# Altium PCB PCB1.PcbDoc
Units mm, origin at the board's own origin, x right, y up, seen from the top; angles counter-clockwise.
Board outline 60 x 32 mm, 2 copper layers (Top Layer, Bottom Layer); 27 components, 11 nets, 72 pads, 72 vias.
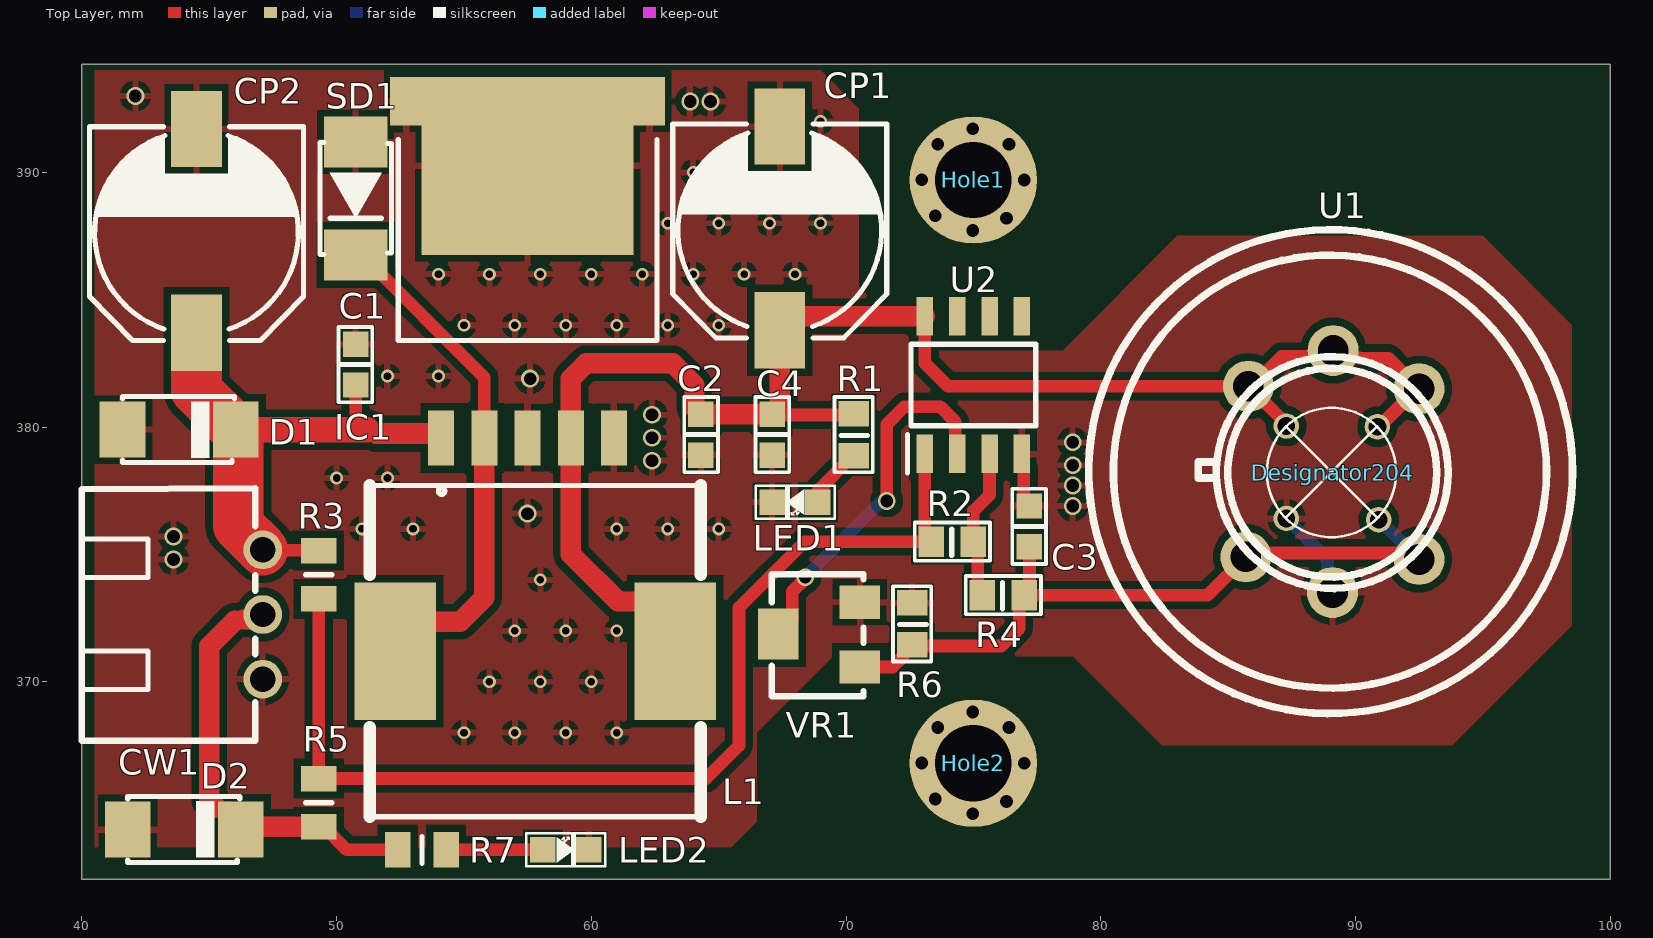
[diagram p0: Top Layer view]
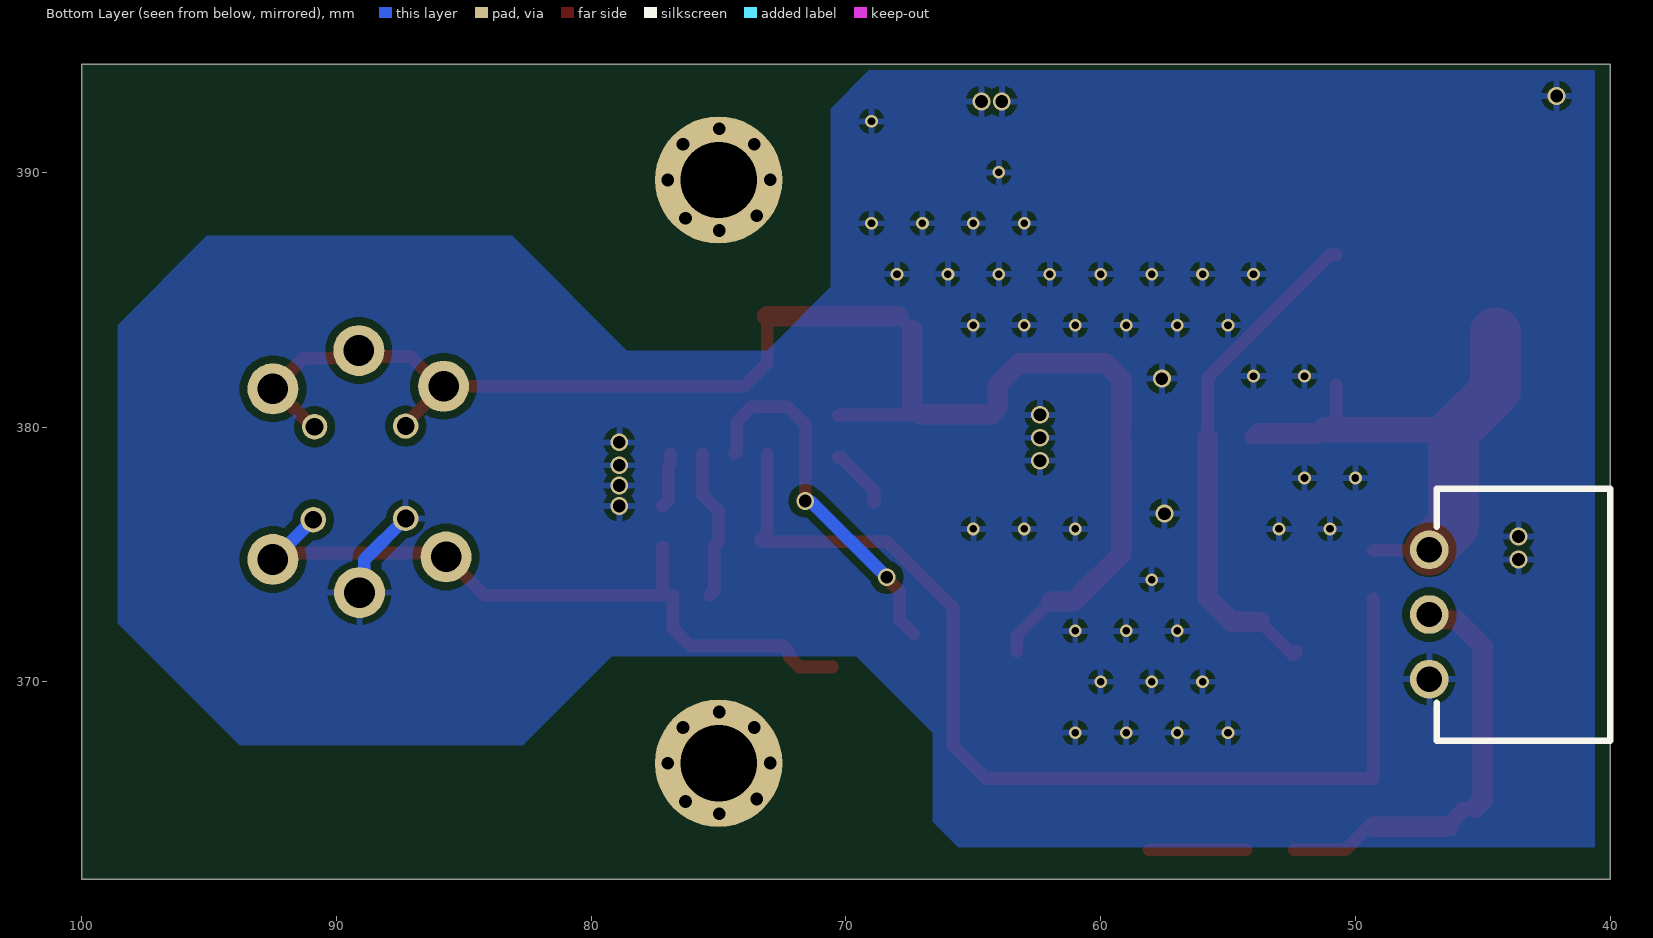
[diagram p1: Bottom Layer view, seen from below]
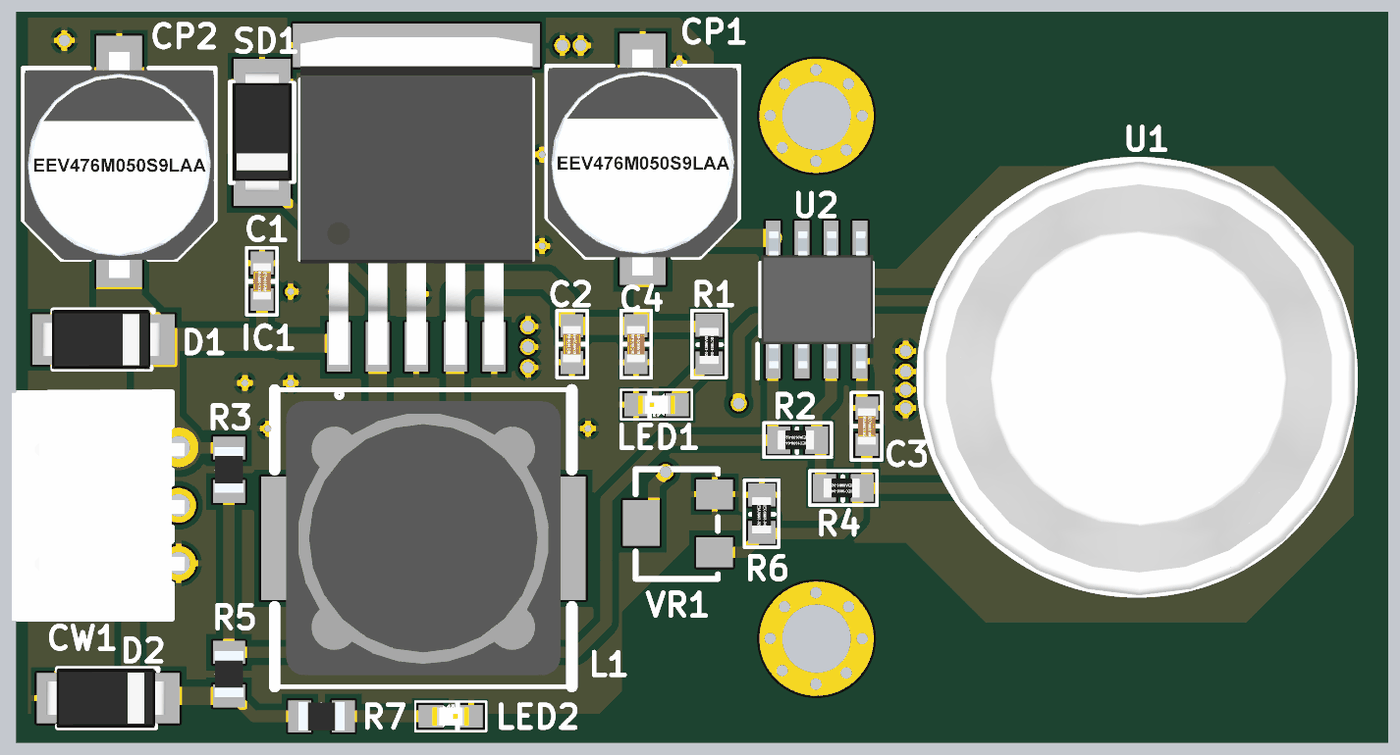
[diagram p2: 3D render of the assembled board from above, using the file's embedded part models]

## Layer stack, top to bottom
Top Solder: solder mask 0.0102, Solder Resist, Dk 3.5
Top Layer: signal copper 0.0356
Dielectric 1: dielectric 0.32, FR-4, Dk 4.8
Bottom Layer: signal copper 0.0356
Bottom Solder: solder mask 0.0102, Solder Resist, Dk 3.5

## Board outline
40,362.25 100,362.25 100,394.25 40,394.25

## Design rules (kind name [scope] priority, off if disabled: settings)
Clearance "Schematic Clearance Constraint_10" [InNet('GND')] p1: gap=0.3 ignorepadtopadclearanceinfootprint=FALSE
Clearance "Schematic Clearance Constraint_9" [InNet('NetU2_2')] p2: gap=0.3 ignorepadtopadclearanceinfootprint=FALSE
Clearance "Schematic Clearance Constraint_8" [InNet('NetR2_2')] p3: gap=0.3 ignorepadtopadclearanceinfootprint=FALSE
Clearance "Schematic Clearance Constraint_7" [InNet('NetLED1_1')] p4: gap=0.3 ignorepadtopadclearanceinfootprint=FALSE
Clearance "Schematic Clearance Constraint_6" [InNet('SIGNAL_OUT')] p5: gap=0.3 ignorepadtopadclearanceinfootprint=FALSE
Clearance "Schematic Clearance Constraint_5" [InNet('NetIC1_2')] p6: gap=0.3 ignorepadtopadclearanceinfootprint=FALSE
Clearance "Schematic Clearance Constraint_4" [InNet('GND')] p7: gap=0.2 ignorepadtopadclearanceinfootprint=FALSE
Clearance "Schematic Clearance Constraint_3" [InNet('+24')] p8: gap=0.3 ignorepadtopadclearanceinfootprint=FALSE
Clearance "Schematic Clearance Constraint_2" [InNet('V_SENS')] p9: gap=0.3 ignorepadtopadclearanceinfootprint=FALSE
Clearance "Schematic Clearance Constraint_1" [InNet('NetR2_1')] p10: gap=0.3 ignorepadtopadclearanceinfootprint=FALSE
Clearance "Schematic Clearance Constraint" [InNet('+5')] p11: gap=0.3 ignorepadtopadclearanceinfootprint=FALSE
Clearance [All] p12: gap=0.254 ignorepadtopadclearanceinfootprint=FALSE except(0: Arc-Hole Track-Hole SMDPad-Hole THPad-Hole Via-Hole Fill-Hole Poly-Hole Region-Hole Text-Hole)
ComponentClearance [All] p1: gap=0 collisioncheckmode=3 verticalgap=0 showdistances=FALSE
PolygonConnect [All] p1: connectstyle=Relief reliefconductorwidth=0.254 reliefentries=4 polygonreliefangle="90 Angle" airgapwidth=0.254
RoutingVias "Schematic Routing Via Style_10" [InNet('NetLED2_1')] p1: holewidth=0.5 width=0.8 viastyle="Through Hole" minholewidth=0.3 minwidth=0.5 maxholewidth=0.8 maxwidth=1.2
RoutingVias "Schematic Routing Via Style_9" [InNet('NetLED1_1')] p2: holewidth=0.5 width=0.8 viastyle="Through Hole" minholewidth=0.3 minwidth=0.5 maxholewidth=0.8 maxwidth=1.2
RoutingVias "Schematic Routing Via Style_8" [InNet('NetU2_2')] p3: holewidth=0.5 width=0.8 viastyle="Through Hole" minholewidth=0.3 minwidth=0.5 maxholewidth=0.8 maxwidth=1.2
RoutingVias "Schematic Routing Via Style_7" [InNet('NetIC1_2')] p4: holewidth=0.5 width=0.8 viastyle="Through Hole" minholewidth=0.3 minwidth=0.5 maxholewidth=0.8 maxwidth=1.2
RoutingVias "Schematic Routing Via Style_6" [InNet('+24')] p5: holewidth=0.5 width=0.8 viastyle="Through Hole" minholewidth=0.3 minwidth=0.5 maxholewidth=0.8 maxwidth=1.2
RoutingVias "Schematic Routing Via Style_5" [InNet('SIGNAL_OUT')] p6: holewidth=0.5 width=0.8 viastyle="Through Hole" minholewidth=0.3 minwidth=0.5 maxholewidth=0.8 maxwidth=1.2
RoutingVias "Schematic Routing Via Style_4" [InNet('V_SENS')] p7: holewidth=0.5 width=0.8 viastyle="Through Hole" minholewidth=0.3 minwidth=0.5 maxholewidth=0.8 maxwidth=1.2
RoutingVias "Schematic Routing Via Style_3" [InNet('GND')] p8: holewidth=0.5 width=0.8 viastyle="Through Hole" minholewidth=0.3 minwidth=0.5 maxholewidth=0.8 maxwidth=1.2
RoutingVias "Schematic Routing Via Style_2" [InNet('+5')] p9: holewidth=0.5 width=0.8 viastyle="Through Hole" minholewidth=0.3 minwidth=0.5 maxholewidth=0.8 maxwidth=1.2
RoutingVias "Schematic Routing Via Style_1" [InNet('NetR2_2')] p10: holewidth=0.5 width=0.8 viastyle="Through Hole" minholewidth=0.3 minwidth=0.5 maxholewidth=0.8 maxwidth=1.2
RoutingVias "Schematic Routing Via Style" [InNet('NetR2_1')] p11: holewidth=0.5 width=0.8 viastyle="Through Hole" minholewidth=0.3 minwidth=0.5 maxholewidth=0.8 maxwidth=1.2
RoutingVias [All] p12: holewidth=0.711 width=1.27 viastyle="Through Hole" minholewidth=0.711 minwidth=1.27 maxholewidth=0.711 maxwidth=1.27
SolderMaskExpansion [All] p1: expansion=0.102 istentingtop=FALSE
UnpouredPolygon [All] p1: allowunpoured=TRUE allowshelved=TRUE
Width "Schematic Width Constraint_10" [InNet('NetLED2_1')] p1: maxlimit=2 minlimit=0.3 preferedwidth=0.5
Width "Schematic Width Constraint_9" [InNet('NetU2_2')] p2: maxlimit=2 minlimit=0.3 preferedwidth=0.5
Width "Schematic Width Constraint_8" [InNet('NetR2_2')] p3: maxlimit=2 minlimit=0.3 preferedwidth=0.5
Width "Schematic Width Constraint_7" [InNet('NetLED1_1')] p4: maxlimit=2 minlimit=0.3 preferedwidth=0.5
Width "Schematic Width Constraint_6" [InNet('SIGNAL_OUT')] p5: maxlimit=2 minlimit=0.3 preferedwidth=0.5
Width "Schematic Width Constraint_5" [InNet('NetIC1_2')] p6: maxlimit=2 minlimit=0.3 preferedwidth=0.5
Width "Schematic Width Constraint_4" [InNet('GND')] p7: maxlimit=2 minlimit=0.3 preferedwidth=0.5
Width "Schematic Width Constraint_3" [InNet('+24')] p8: maxlimit=2 minlimit=0.3 preferedwidth=0.5
Width "Schematic Width Constraint_2" [InNet('V_SENS')] p9: maxlimit=2 minlimit=0.3 preferedwidth=0.5
Width "Schematic Width Constraint_1" [InNet('NetR2_1')] p10: maxlimit=2 minlimit=0.3 preferedwidth=0.5
Width "Schematic Width Constraint" [InNet('+5')] p11: maxlimit=2 minlimit=0.3 preferedwidth=0.5
Width [All] p12: maxlimit=2 minlimit=0.3 preferedwidth=0.5
28 further rules are at their usual default settings.

## Components (designator, comment, footprint, x,y, rotation, side; value= is the part's Value field where it differs from the comment)
C1 "CS1608" CC1608 50.75,383.25 r270 top
C2 "CS1608" CC1608 64.3,378.9 r90 top
C3 "CS1608" CC1608 77.2,376.9 r270 top
C4 "CS1608" CC1608 67.1,378.9 r90 top
CP1 "CP8_SMT" CP8_SMT 67.4,391.8 r270 top
CP2 "CP8_SMT" CP8_SMT 44.5,391.7 r270 top
CW1 "SMW250-03L" SMW250-03L 47.1,375.18 r270 top
D1 "TVS5025" TVS5025 46.04,379.9 r180 top
D2 "TVS5025" TVS5025 46.24,364.2 r180 top
Designator204 "Comment" MQ-4#1 89.1,378.2 r90 top
Hole1 "Pad50 Hole30" PAD50H30 75,389.7 r0 top
Hole2 "Pad50 Hole30" PAD50H30 75,366.8 r0 top
IC1 "LM2596S-5.0_NOPB" KTT0005B 57.5,392.036 r270 top
L1 "SC1260" SC1260S 52.3,371.2 r90 top
LED1 "LED1608" LED1608 68.9,377.05 r180 top
LED2 "LED1608" LED1608 58.1,363.4 r0 top
R1 "CS" R1608N 70.3,380.525 r270 top value=470
R2 "CS" R1608N 75,375.5 r180 top value=1M
R3 "CS" RESC2012X65N 49.3,374.2 r90 top value=4.7K
R4 "CS" R1608N 77,373.4 r180 top value=4.7k
R5 "CS" RESC2012X65N 49.3,365.25 r270 top value=100
R6 "CS" R1608N 72.6,373.1 r270 top value=10k
R7 "CS" RESC2012X65N 53.35,363.4 r180 top value=4.7K
SD1 "SK_SMT" D5025 50.75,391.19 r270 top
U1 "MQ-4" MQ-4#2 89.1,383 r270 top
U2 "LM2904_S" SOIC127P600X175-8N 75,381.65 r90 top
VR1 "VR3224W" 3224W 70.541,370.581 r90 top

## Footprints (in the part's own frame and the unit in brackets; to place one, negate y for a bottom-side part, rotate by r counter-clockwise, add the part's x,y. Pads: shape width x height; smd on the part's side, far side on the other; paste and mask are expansions set on the pad)
3224W [mm]
  rect 1.3x1.6 smd: 1(0,0) 3(2.54,0)
  rect 2x1.6 smd: 2(1.29,3.204)
  silkscreen extent -1.16,-0.15 3.64,3.45
CC1608 [mm]
  rect 1x1 smd: 1(0,0) 2(1.6,0)
  silkscreen extent -0.67,-0.67 2.27,0.65, body extent 0,-0.4 1.6,0.4, height 0.8
CP8_SMT [mm]
  rect 3x2 smd: 1(0,0) 2(8,0)
  silkscreen extent -0.09,-4.2 8.3,4.2, body extent -0.8,-4.15 9.1,4.15, height 6.2
D5025 [mm]
  rect 2x2.5 smd: 1(0,0) 2(4.44,0)
  silkscreen extent 0.02,-1.4 4.42,1.4, body extent -0.4,-1.3 4.8,1.3, height 2.3
KTT0005B [mm]
  rect 2.16x1.02 smd: 1(12.461,-3.4) 2(12.461,-1.7) 3(12.461,0) 4(12.461,1.7) 5(12.461,3.4)
  rect 1.91x1.235 smd: 6(-0.754,4.782) 6(-0.754,-4.782)
  rect 6.99x8.33 smd: 6(1.786,0)
  silkscreen extent 0.76,-5.08 14.68,5.08, body extent -1.11,-5.08 13.24,5.08, height 4.72
LED1608 [mm]
  rect 1x1 smd: 1(0,0) 2(1.8,0)
  silkscreen extent -0.65,-0.65 2.45,0.65, body extent 0.1,-0.4 1.7,0.4, height 0.8
MQ-4#1 [mm]
  round 1 hole 0.7: 1(-1.787,1.813) 2(-1.837,-1.812) 3(1.813,-1.762) 4(1.838,1.813)
  silkscreen extent -4.54,-4.54 4.56,5.28
MQ-4#2 [mm]
  round 2 hole 1.2: 1(1.5,3.4) 2(-0.004,0.027) 3(1.4,-3.3) 4(8.1,-3.4) 5(9.5,0) 6(8.2,3.4)
  silkscreen extent -4.75,-9.57 14.25,9.42, body extent -4.7,-9.48 14.3,9.49, height 18.5
PAD50H30 [mm]
  round 5 hole 3: 1(0,0)
R1608N [mm]
  rect 1x1.2 smd: 1(0,0) 2(1.65,0)
  silkscreen extent -0.65,-0.75 2.3,0.75, body extent 0.1,-0.43 1.7,0.43, height 0.45
RESC2012X65N [mm]
  rect 1x1.4 smd: 1(-0.95,0) 2(0.95,0)
  silkscreen extent 0,-0.53 0,0.53, body extent -1,-0.63 1,0.63, height 0.65
SC1260S [mm]
  rect 5.4x3.2 smd: 1(0,0) 2(0,-11)
  silkscreen extent -6.5,-12 6.5,1, body extent -6,-11.5 6,0.5, height 6.01
SMW250-03L [mil]
  round 60 hole 39.37: 1(0,0) 2(100,0) 3(200,0)
  silkscreen extent -95,-280 295,-12, body extent -94,-287 299,12, height 260
SOIC127P600X175-8N [mm]
  rect 1.5x0.65 smd: 1(-2.7,1.905) 2(-2.7,0.635) 3(-2.7,-0.635) 4(-2.7,-1.905) 5(2.7,-1.905) 6(2.7,-0.635) 7(2.7,0.635) 8(2.7,1.905)
  silkscreen extent -3.45,-2.45 1.6,2.58, body extent -3,-2.48 3,2.42, height 1.75
TVS5025 [mm]
  rect 1.8x2.2 smd: 1(0,0) 2(4.44,0)
  silkscreen extent 0.04,-1.3 4.44,1.3, body extent -0.28,-1.3 4.92,1.3, height 2.3

## Part data
C1 C2 C3 C4 D1 D2 LED1 LED2 U1: Part No.="{Part No}"
  C1 C2 C4: Price=6, 규격=0.1uF
  C3: Price=6, 규격=0.01uF
  D1 D2 U1: Price={Price}
  LED1: Name=+5V, Price={Price}
  LED2: Name=OUT, Price={Price}
CP1 CP2: Part No.="RV35V220 8*10.5 (ELNA /삼영)", Price=69
  CP1: 규격=220uF/35V
  CP2: 규격=100uF/50V
CW1: Part No.=SMAW025-03, Name={Name}, Price={Price}
Hole1 Hole2: library part PAD50h30, "Pad70 Hole 40"
IC1: "Integrated Circuit", Arrow Part Number=LM2596S-5.0/NOPB, Manufacturer_Name="Texas Instruments", Mouser Part Number=926-LM2596S-5.0/NOPB, Arrow Price/Stock=https://www.arrow.com/en/products/lm2596s-5-0nopb_9/texas-instruments.html?utm_currency=USD&region=nac, Datasheet Link=https://www.ti.com/lit/gpn/LM2596, Manufacturer_Part_Number=LM2596S-5.0/NOPB, Mouser Price/Stock=https://www.mouser.co.uk/ProductDetail/Texas-Instruments/LM2596S-5.0-NOPB?qs=X1J7HmVL2ZHVjCOmW%252BYINA%3D%3D
L1: "Inductor", Manufacturer_Name=TDK, Manufacturer_Part_Number=VLP8040T-100M, Mouser Part Number=810-VLP8040T-100M, Part No.=SC1260-330M(33uH), Arrow Price/Stock=https://www.arrow.com/en/products/vlp8040t-100m/tdk, Datasheet Link=https://componentsearchengine.com/Datasheets/2/VLP8040T-100M.pdf, Height=4mm, Mouser Price/Stock=https://www.mouser.co.uk/ProductDetail/TDK/VLP8040T-100M?qs=uxmvvYJjMIsKO4pNbUQWxA%3D%3D, Price={Price}
R1 R2 R3 R4 R5 R6 R7: library part R_SMT, Part No.="{Part No}", Price={Price}
SD1: Part No.=SS34, Price={Price}, 규격={Value}
U2: Part No.=LM393, Price={Price}
VR1: Part No.=10K, Price={Price}

## Via types
v1: diameter 0.5, hole 0.3, Top Layer to Bottom Layer, 40 vias
v2: diameter 0.7, hole 0.5, Top Layer to Bottom Layer, 32 vias

## Nets (pads, with @x,y where several pads share a name; then routed paths per layer and width w, separated by ;. In a path a pad name is that pad's centre, name@x,y a point inside that pad or via, vN(x,y) a via of type N, cw(c..) or ccw(c..) an arc to the next point about the centre after c; other vN are vias at no path point)
+5: C2.2 C4.2 CP1.2 Designator204.3 Designator204.4 IC1.4 L1.2 R1.1 U1.1 U1.2 U1.3 U2.8 | length 62
  Top Layer w0.5: IC1.4@59.083,379.837 IC1.4@59.2,379.954 ; L1.2@61.95,373.15 63.3,371.8 L1.2 ; C2.2@64.05,380.75 C2.2 ; C4.2@67.4,380.8 C4.2 67.125,380.475 70.275,380.475 R1.1@70.3,380.45 ; CP1.2 CP1.2@67.95,384.35 ; U2.8 73.095,382.505 74,381.6 U1.3 ; Designator204.4@87.287,380.112 U1.3 ; Designator204.3 90.937,380.013 92.425,381.5 U1.1 91.3,382.7 90.17,382.7 90.153,382.717 89.414,382.717 U1.2 88.895,382.771 87.104,382.771 85.933,381.6 U1.3
  Top Layer w0.8: IC1.4 59.2,375 61.05,373.15 L1.2@61.95,373.15 ; IC1.4@59.2,379.954 59.2,381.9 59.8,382.5 63.2,382.5 64.05,381.65 C2.2@64.05,380.75 ; C2.2 C4.2 ; C4.2@67.4,380.8 CP1.2 ; CP1.2@67.95,384.35 U2.8
+24: C1.2 CP2.2 CW1.1 D1.1 IC1.1 R3.2 | length 24.8
  Top Layer w0.5: CW1.1 47.115,375.165 49.285,375.165 R3.2 ; 50.75,379.9 C1.2 ; 51.2,379.9 51.525,379.575 IC1.1 54.1,379.64 53.84,379.9 51.2,379.9
  Top Layer w1: D1.1 51.2,379.9
  Top Layer w2: CP2.2 44.5,381.44 D1.1 46.14,379.8 46.14,376.14 CW1.1
GND: C1.1 C2.1 C3.1 C4.1 CP1.1 CP2.1 CW1.3 D1.2 D2.2 Designator204.1 IC1.3 IC1.5 IC1.6 LED1.2 LED2.2 R6.1 SD1.1 U1.5 U2.4 VR1.3 | length 5.8
  Top Layer w0.5: U2.4 76.905,378.525 76.98,378.45 76.98,377.12 C3.1
  Bottom Layer w0.5: Designator204.1 88.913,374.787 88.913,373.687 U1.5
  other v1: 55,368 57,368 59,368 61,368 56,370 58,370 60,370 57,372 59,372 61,372 58,374 51,376 53,376 61,376 63,376 65,376 50,378 52,378 52,382 54,382 55,384 57,384 59,384 61,384 63,384 65,384 54,386 56,386 58,386 60,386 62,386 64,386 66,386 68,386 63,388 65,388 67,388 69,388 64,390 69,392
  other v2: 43.6,374.8 43.6,375.7 57.5,376.6 78.9,376.9 78.9,377.7 78.9,378.5 62.382,378.679 78.9,379.4 62.382,379.579 62.382,380.479 57.6,381.9 63.882,392.779 64.682,392.779 42.1,393
NetIC1_2: IC1.2 L1.1 SD1.2 | length 20.2
  Top Layer w0.5: SD1.2 51,386.75 55.8,381.95 IC1.2 ; L1.1 52.45,371.05 L1.1@53.75,372.35
  Top Layer w0.8: L1.1@53.75,372.35 54.85,372.35 55.8,373.3 IC1.2
NetLED1_1: LED1.1 R1.2 | length 2.4
  Top Layer w0.5: LED1.1 68.9,377.5 70.2,378.8 R1.2@70.3,378.8
NetLED2_1: LED2.1 R7.1 | length 3.8
  Top Layer w0.5: R7.1 LED2.1
NetR2_1: R2.1 R4.2 U2.3 | length 6
  Top Layer w0.5: R4.2 75.175,373.575 75.175,375.325 R2.1 75,376.7 75.635,377.335 U2.3
NetR2_2: R2.2 R3.1 R5.1 U2.1 | length 41.7
  Top Layer w0.5: R3.1 R5.1 64.5,366.2 65.8,367.5 65.8,372.913 68.387,375.5 R2.2 73.35,375.6 73.095,375.855 U2.1
NetU2_2: U2.2 VR1.2 | length 14.6
  Top Layer w0.5: VR1.2 67.887,372.421 67.887,373.532 68.4,374.046 v2(68.4,374.1) ; v2(71.6,377.1) 71.6,380.1 72.3,380.8 73.7,380.8 74.29,380.21 74.29,379.025 U2.2
  Bottom Layer w0.5: v2(68.4,374.1) 71.362,377.062 71.562,377.062 v2(71.6,377.1)
SIGNAL_OUT: CW1.2 D2.1 R5.2 R7.2 | length 17.8
  Top Layer w0.5: 45.293,365.05 45.59,365.05 46.24,364.4 D2.1 ; D2.1@45.77,365.05 D2.1@46.52,364.3 ; 46,372.4 46.295,372.4 46.339,372.444 ; CW1.2@46.904,372.444 CW1.2 ; R5.2 49.5,364.3 50.4,363.4 R7.2
  Top Layer w0.8: 45.293,365.05 45,365.343 45,371.4 46,372.4 ; 46.339,372.444 CW1.2@46.904,372.444 ; D2.1@46.52,364.3 R5.2
V_SENS: C3.2 Designator204.2 R4.1 R6.2 U1.4 U1.6 VR1.1 | length 29.3
  Top Layer w0.5: VR1.1 71.831,370.581 72.25,371 72.25,371.2 72.45,371.4 R6.2@72.65,371.4 ; R6.2 R6.2@72.65,371.4 ; R4.1@76.8,373.4 76.8,372.1 76.1,371.4 R6.2@72.65,371.4 ; C3.2 77.2,373.6 R4.1 84.2,373.4 U1.4 85.85,375.05 U1.6@92.225,375.05 ; U1.6@92.225,375.05 92.475,374.8 U1.6 92.25,375.05 U1.6@92.225,375.05
  Bottom Layer w0.5: Designator204.2 90.925,376.363 92.487,374.8 U1.6
pads on no net: Hole1.1 Hole2.1 U2.5 U2.6 U2.7
copper on no net:
  other v2: 74.975,364.813 76.3,365.3 73.5,365.4 72.975,366.813 77,366.8 73.6,368.2 76.4,368.2 74.975,368.813 74.975,387.713 76.3,388.2 73.5,388.3 72.975,389.713 77,389.7 73.6,391.1 76.4,391.1 74.975,391.713

## Polygon pours and split planes (outlines as drawn)
GND on Top Layer "NONET_L-01_P-001" (solid, pour order 0): 40.5,394 69,394 70.5,392.5 70.5,385.5 73,383 78.5,383 83,387.5 95,387.5 98.5,384 98.5,372.2 93.8,367.5 82.4,367.5 78.9,371 69.5,371 66.5,368 66.5,364.5 65.5,363.5 40.5,363.5
GND on Bottom Layer "NONET_L-01_P-001" (solid, pour order 1): 40.6,394 69.1,394 70.6,392.5 70.6,385.5 73.1,383 78.6,383 83.1,387.5 95.1,387.5 98.6,384 98.6,372.3 93.8,367.5 82.7,367.5 79.2,371 69.6,371 66.6,368 66.6,364.5 65.6,363.5 40.6,363.5

## Silkscreen, mask and mechanical layers (free items; w line width, h text height)
Drill Guide:
  circle w0.05: c75,366.798 r1.5
  circle w0.05: c75,389.702 r1.5
  lines w0.05: 40,393.5 40,362.25 100,362.25 100,393.5